# Altium PCB FILTER.PcbDoc
Units mm, origin at the board's own origin, x right, y up, seen from the top; angles counter-clockwise.
Board outline 88 x 30 mm, 2 copper layers (Top Layer, Bottom Layer), stack 1.071 mm thick; 17 components, 10 nets, 32 pads, 10 vias.
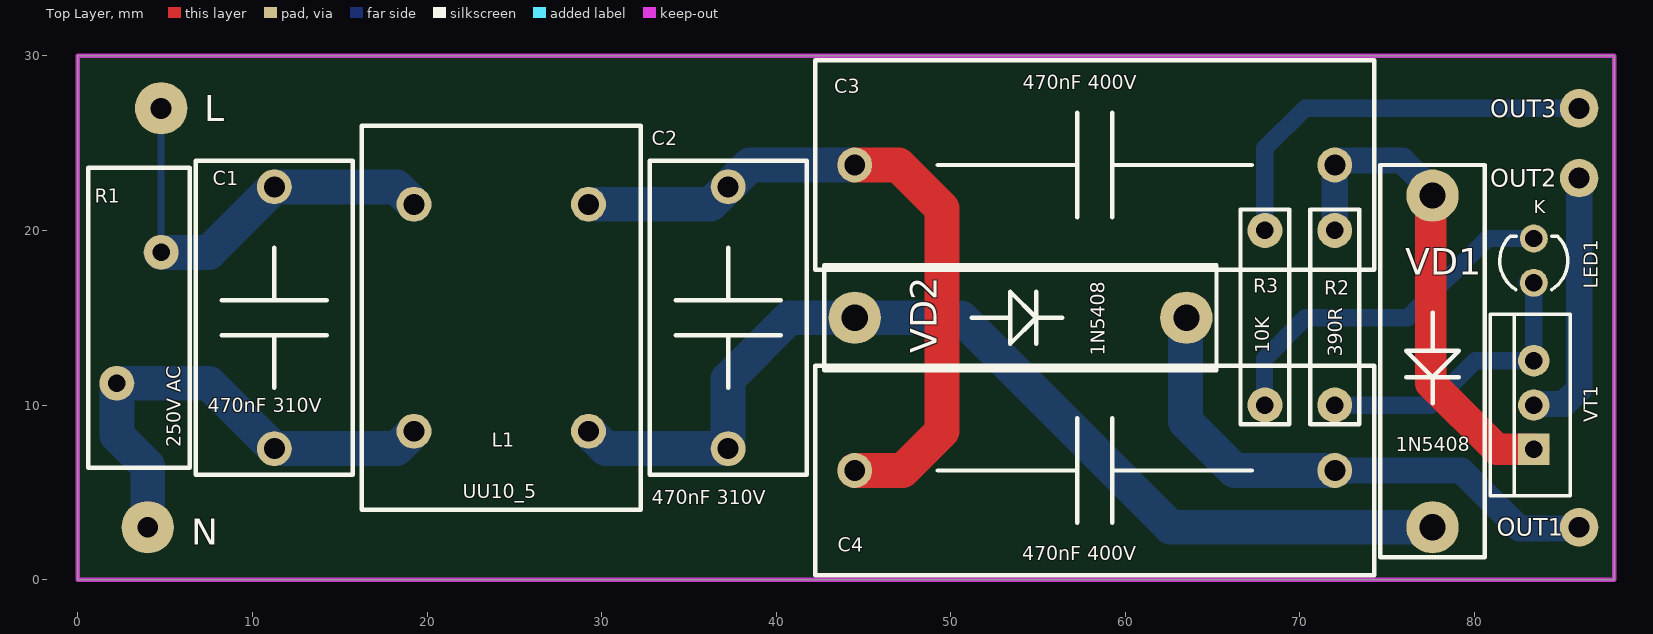
[diagram p0: Top Layer view]
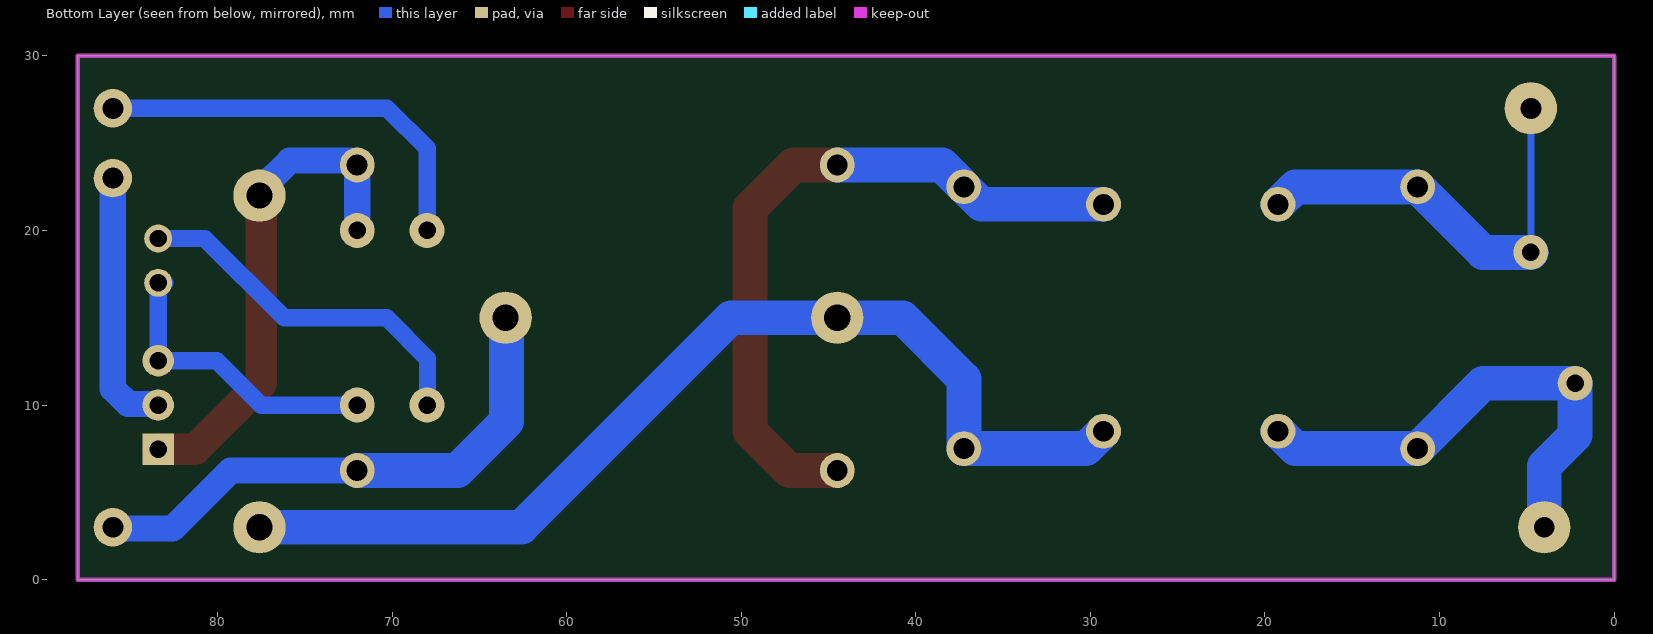
[diagram p1: Bottom Layer view, seen from below]
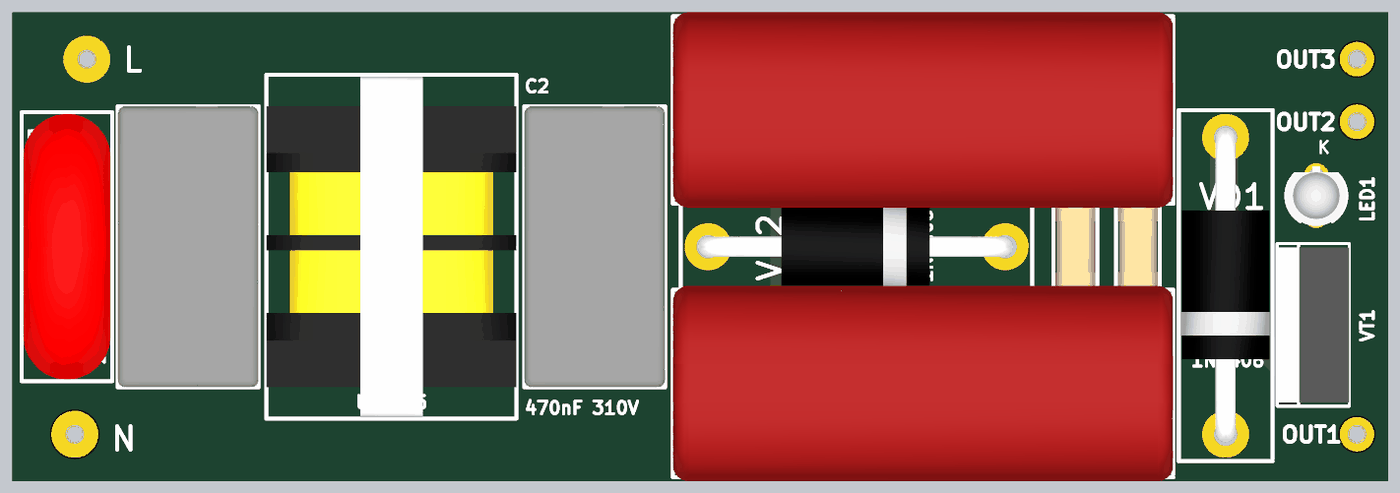
[diagram p2: 3D render of the assembled board from above, using the file's embedded part models]

## Layer stack, top to bottom
Top Solder: solder mask 0.0102, Solder Resist, Dk 3.5
Top Layer: signal copper 0.0356
Dielectric 1: dielectric 1, FR-4, Dk 4.8
Bottom Layer: signal copper 0.0356
Bottom Solder: solder mask 0.0102, Solder Resist, Dk 3.5

## Board outline
0,0 88,0 88,30 0,30

## Design rules (kind name [scope] priority, off if disabled: settings)
Clearance [All] p1: gap=0.3 ignorepadtopadclearanceinfootprint=FALSE except(0.2: Text-Text Text-Hole)
ComponentClearance [All] p1: gap=0.1 collisioncheckmode=3 verticalgap=0.1 showdistances=FALSE
DiffPairsRouting [All] p1: maxlimit=0.254 minlimit=0.254 mostfreqgap=0.254 substack1={A23D90DD-733B-49C5-8102-56B3D284E3A0} toplayer_{a23d90dd-733b-49c5-8102-56b3d284e3a0}_minwidth=0.381 toplayer_{a23d90dd-733b-49c5-8102-56b3d284e3a0}_maxwidth=0.381 toplayer_{a23d90dd-733b-49c5-8102-56b3d284e3a0}_prefwidth=0.381 bottomlayer_{a23d90dd-733b-49c5-8102-56b3d284e3a0}_minwidth=0.381 bottomlayer_{a23d90dd-733b-49c5-8102-56b3d284e3a0}_maxwidth=0.381 bottomlayer_{a23d90dd-733b-49c5-8102-56b3d284e3a0}_prefwidth=0.381 toplayer_minwidth=0.381 toplayer_maxwidth=0.381 toplayer_prefwidth=0.381 bottomlayer_minwidth=0.381 bottomlayer_maxwidth=0.381 bottomlayer_prefwidth=0.381 substack2={0B3DB408-A969-412D-8C07-BA8AE97219D9} toplayer_{0b3db408-a969-412d-8c07-ba8ae97219d9}_minwidth=0.381 toplayer_{0b3db408-a969-412d-8c07-ba8ae97219d9}_maxwidth=0.381 toplayer_{0b3db408-a969-412d-8c07-ba8ae97219d9}_prefwidth=0.381 bottomlayer_{0b3db408-a969-412d-8c07-ba8ae97219d9}_minwidth=0.381 bottomlayer_{0b3db408-a969-412d-8c07-ba8ae97219d9}_maxwidth=0.381 bottomlayer_{0b3db408-a969-412d-8c07-ba8ae97219d9}_prefwidth=0.381 substack3={378827E6-B38F-4565-9D2F-710D8D441C30} toplayer_{378827e6-b38f-4565-9d2f-710d8d441c30}_minwidth=0.381 toplayer_{378827e6-b38f-4565-9d2f-710d8d441c30}_maxwidth=0.381 toplayer_{378827e6-b38f-4565-9d2f-710d8d441c30}_prefwidth=0.381 bottomlayer_{378827e6-b38f-4565-9d2f-710d8d441c30}_minwidth=0.381 bottomlayer_{378827e6-b38f-4565-9d2f-710d8d441c30}_maxwidth=0.381 bottomlayer_{378827e6-b38f-4565-9d2f-710d8d441c30}_prefwidth=0.381 substack4={1E65D4A7-266F-4925-B814-5E9C4A66F8EE} toplayer_{1e65d4a7-266f-4925-b814-5e9c4a66f8ee}_minwidth=0.381 toplayer_{1e65d4a7-266f-4925-b814-5e9c4a66f8ee}_maxwidth=0.381 toplayer_{1e65d4a7-266f-4925-b814-5e9c4a66f8ee}_prefwidth=0.381 bottomlayer_{1e65d4a7-266f-4925-b814-5e9c4a66f8ee}_minwidth=0.381 bottomlayer_{1e65d4a7-266f-4925-b814-5e9c4a66f8ee}_maxwidth=0.381 bottomlayer_{1e65d4a7-266f-4925-b814-5e9c4a66f8ee}_prefwidth=0.381 substack5={93C5D03E-862D-45F8-9871-970EEA9B3F11} toplayer_{93c5d03e-862d-45f8-9871-970eea9b3f11}_minwidth=0.381 toplayer_{93c5d03e-862d-45f8-9871-970eea9b3f11}_maxwidth=0.381 toplayer_{93c5d03e-862d-45f8-9871-970eea9b3f11}_prefwidth=0.381 bottomlayer_{93c5d03e-862d-45f8-9871-970eea9b3f11}_minwidth=0.381 bottomlayer_{93c5d03e-862d-45f8-9871-970eea9b3f11}_maxwidth=0.381 bottomlayer_{93c5d03e-862d-45f8-9871-970eea9b3f11}_prefwidth=0.381 maxuncoupledlength=12.7
Height [All] p1: minheight=0 maxheight=30 prefheight=30
HoleSize [All] p1: absolutevalues=TRUE maxlimit=6 minlimit=0.01 maxpercent=80.000 minpercent=20.000
HoleToHoleClearance [All] p1: gap=0.1 allowstackedmicrovias=TRUE
MinimumSolderMaskSliver [All] p1: minsoldermaskwidth=0.1
PlaneConnect [All] p1: pad.planeconnectstyle=Relief pad.reliefexpansion=0.5 pad.reliefentries=4 pad.reliefconductorwidth=0.5 pad.reliefairgap=0.15 via.planeconnectstyle=Direct via.reliefexpansion=0.5 via.reliefentries=4 via.reliefconductorwidth=0.5 via.reliefairgap=0.15
PolygonConnect VQFN20 [HasFootprint('VQFN20')] p1: connectstyle=Direct reliefconductorwidth=0.254 reliefentries=4 polygonreliefangle="90 Angle" airgapwidth=0.254
PolygonConnect [All] p2: thpad.connectstyle=Relief thpad.reliefconductorwidth=0.3 thpad.reliefentries=4 thpad.polygonreliefangle="90 Angle" thpad.airgapwidth=0.15 smdpad.connectstyle=Relief smdpad.reliefconductorwidth=0.3 smdpad.reliefentries=4 smdpad.polygonreliefangle="90 Angle" smdpad.airgapwidth=0.15 via.connectstyle=Direct via.reliefconductorwidth=0.3 via.reliefentries=4 via.polygonreliefangle="90 Angle" via.airgapwidth=0.15
RoutingVias [All] p1: holewidth=0.1 width=0.1 viastyle="Through Hole" minholewidth=0.11 minwidth=0.1 maxholewidth=2 maxwidth=1
ShortCircuit [All] p1: allowed=TRUE
SilkToSolderMaskClearance [IsPad] p1: minsilkscreentomaskgap=0.1 clearancetoexposedcopper=TRUE
SolderMaskExpansion SolderMaskExpansion_Via [IsVia] p1: expansion=0.102 istentingtop=TRUE
SolderMaskExpansion [All] p2: expansion=0.01 istentingtop=FALSE
UnRoutedNet [All] p1: checkbadconnections=TRUE
Width [All] p1: maxlimit=5 minlimit=0.2 preferedwidth=0.3 substack1={A23D90DD-733B-49C5-8102-56B3D284E3A0} substack2={0B3DB408-A969-412D-8C07-BA8AE97219D9} substack3={378827E6-B38F-4565-9D2F-710D8D441C30} substack4={1E65D4A7-266F-4925-B814-5E9C4A66F8EE} substack5={93C5D03E-862D-45F8-9871-970EEA9B3F11}
20 further rules are at their usual default settings.

## Components (designator, comment, footprint, x,y, rotation, side; value= is the part's Value field where it differs from the comment)
C1 "470nF 310V" CAP_FILM 11.25,15 r270 top locked
C2 "470nF 310V" CAP_FILM 37.25,15 r270 top locked
C3 "470nF 400V" "CAP 225J 400V" 58.25,23.75 r180 top locked
C4 "470nF 400V" "CAP 225J 400V" 58.25,6.25 r180 top locked
L "Test_Point_PCB" Test_Point#1 4.77,27 r90 top locked
L1 "UU10_5" UU10_5 24.25,15 r90 top locked
LED1 "151033BS03000" "Type 3mm" 83.4,18.27 r90 top locked
N "Test_Point_PCB" Test_Point#2 4,3 r90 top locked
OUT1 "Test_Point_PCB" Test_Point#3 86,3 r90 top locked
OUT2 "Test_Point_PCB" Test_Point#3 86,23 r90 top locked
OUT3 "Test_Point_PCB" Test_Point#3 86,27 r90 top locked
R1 "250V AC" VARISTOR 3.5,15 r270 top locked
R2 "390R" RES025W 72,15 r90 top locked
R3 "10K" RES025W 68,15 r90 top locked
VD1 "1N5408" 1N5408 77.6,12.5 r90 top locked
VD2 "1N5408" 1N5408 54,15 r180 top
VT1 "TYN412" TO-220-3 81,10 r90 top locked

## Footprints (in the part's own frame and the unit in brackets; to place one, negate y for a bottom-side part, rotate by r counter-clockwise, add the part's x,y. Pads: shape width x height; smd on the part's side, far side on the other; paste and mask are expansions set on the pad)
1N5408 [mm]
  round 3 hole 1.5: 1(-9.5,0) 2(9.5,0)
  silkscreen extent -11.22,-3 11.25,3, body extent -10,-2.82 10.14,2.82, height 6.81
"CAP 225J 400V" [mm]
  round 2 hole 1.2: 1(-13.75,0) 2(13.75,0)
  silkscreen extent -16,-6 16,6, body extent -16,-6.25 16,6.25, height 26.5
CAP_FILM [mm]
  round 2 hole 1.2: 1(-7.5,0) 2(7.5,0)
  silkscreen extent -9,-4.5 9,4.5, body extent -9,-4.5 9,4.5, height 17.5
RES025W [mm]
  round 2 hole 1: 1(-5,0) 2(5,0)
  silkscreen extent -6.1,-1.4 6.2,1.4, body extent -5.33,-1.24 5.33,1.24, height 1.55
Test_Point#1 [mm]
  round 3 hole 1: 1(0,0)
Test_Point#2 [mm]
  round 3 hole 1 unplated paste+0.102 mask+0.102: 1(0,0)
Test_Point#3 [mm]
  round 2.2 hole 1 unplated paste+0.102 mask+0.102: 1(0,0)
TO-220-3 [mm]
  rect 1.8x1.8 hole 1: 1(-2.54,-2.4)
  round 1.8 hole 1: 2(0,-2.4) 3(2.54,-2.4)
  silkscreen extent -5.2,-4.5 5.2,0.1, body extent -4.95,-4.5 4.95,0, height 18.8
"Type 3mm" [mm] "THT, LED-3mm, 2pin- Body 4.15mm(max)"
  round 1.6 hole 1: 1(1.27,0) 2(-1.27,0)
  silkscreen extent -1.66,-1.95 1.4,1.95, body extent -1.93,-1.94 1.87,1.94, height 10.5
UU10_5 [mm]
  round 2 hole 1.2: 1(-6.5,5) 2(6.5,5) 3(6.5,-5) 4(-6.5,-5)
  silkscreen extent -11,-8 11,8, body extent -10.9,-8 10.89,8, height 24.48
VARISTOR [mm]
  round 2 hole 1: 1(-3.75,1.27) 2(3.75,-1.27)
  silkscreen extent -8.6,-2.9 8.6,2.9, body extent -8.5,-2.8 8.5,2.8, height 22.49

## Part data
C1 C2: library part CAP_FILM
C3 C4: library part "CAP 225J 400V"
L N OUT1 OUT2 OUT3: library part TP_PCB?, "Test_Point"
LED1: "THT LED round mono-color waterclear, WL-TMRW , Blue", Emitting color=Blue, Manufacturer="Wuerth Elektronik", ComponentLink1Description="Manufacturer URL", ComponentLink1URL=http://www.we-online.com, ComponentLink2Description=Datasheet, ComponentLink2URL=http://katalog.we-online.de/pbs/datasheet/7448042001.pdfhttp://katalog.we-online.de/pbs/datasheet/7448042001.pdfhttp://katalog.we-online.de/pbs/datasheet/7448042001.pdfhttp://katalog.we-online.de/pbs/datasheet/151033BS03000.pdf, PackageReference="Type 3mm", PartNumber=151033BS03000
R1: library part VARISTOR
R2 R3: library part RES
VD1 VD2: library part DIODE

## Via types
v1: diameter 2, hole 1.2, Top Layer to Bottom Layer, tented both sides, 5 vias
v2: diameter 1.8, hole 1, Top Layer to Bottom Layer, tented both sides, 5 vias

## Nets (pads, with @x,y where several pads share a name; then routed paths per layer and width w, separated by ;. In a path a pad name is that pad's centre, name@x,y a point inside that pad or via, vN(x,y) a via of type N, cw(c..) or ccw(c..) an arc to the next point about the centre after c; other vN are vias at no path point)
NetC1_1: C1.1 L1.2 L.1 R1.1 | length 24.8
  Bottom Layer w0.4: R1.1 v2(4.77,27) L.1@4.77,27.075
  Bottom Layer w2: R1.1 7.5,18.75 C1.1 18.25,22.5 L1.2
NetC1_2: C1.2 L1.1 N.1 R1.2 | length 28.2
  Bottom Layer w2: N.1@3.809,3.191 v2(4,3) 4,6.5 2.23,8.27 R1.2 7.5,11.25 C1.2 18.25,7.5 L1.1
NetC2_1: C2.1 C3.2 C4.2 L1.3 | length 40.9
  Top Layer w2: C4.2 47.25,6.25 49.5,8.5 49.5,21.25 47,23.75 C3.2
  Bottom Layer w2: L1.3 36.25,21.5 38.5,23.75 C3.2
NetC2_2: C2.2 L1.4 VD1.1 VD2.2 | length 59.1
  Bottom Layer w2: L1.4 30.25,7.5 C2.2 37.25,11.5 40.75,15 44.25,15 50.6,15 62.6,3 VD1.1@77.5,3
NetC3_1: C3.1 R2.2 VD1.2 VT1.1 | length 28.2
  Top Layer w1.8: VD1.2@77.5,22 77.5,11.25 81.29,7.46 VT1.1
  Bottom Layer w1.5: R2.2 C3.1 72.135,23.75 72.385,24 75.871,24 77.371,22.5 VD1.2@77.5,22.5
NetC4_1: C4.1 OUT1.1 VD2.1 | length 31.1
  Bottom Layer w1.5: C4.1 79.25,6.25 82.575,2.925 OUT1.1@86.125,2.925
  Bottom Layer w2: VD2.1@63.45,14.95 63.45,9.05 66.25,6.25 C4.1
  other v1: 86,3
  other v2: 86,3
NetLED1_1: LED1.1 R3.1 | length 20.9
  Bottom Layer w1: R3.1@67.975,10.025 67.975,12.665 70.31,15 76.18,15 80.72,19.54 LED1.1
NetLED1_2: LED1.2 R2.1 VT1.3 | length 17.1
  Bottom Layer w1: R2.1 77.5,10 80.04,12.54 VT1.3 83.4,16.723 83.123,17 LED1.2@83.023,17
NetOUT2_1: OUT2.1 VT1.2 | length 14.8
  Bottom Layer w1.5: VT1.2 83.457,10.057 85.121,10.057 86,10.936 OUT2.1@86,22.75
  other v1: 86,23
  other v2: 86,23
NetOUT3_1: OUT3.1 R3.2 | length 23.7
  Bottom Layer w1: R3.2 68,24.703 70.297,27 v2(86,27)
  other v1: 86,27
copper on no net:
  other v1: 4,3 4.77,27

## Keep-outs
Keep-Out Layer:
  the board outline again, w0.254

## Text inside footprints (layer, text, board x,y; h text height)
LED1: Top Overlay "K" at 83.4,21 h0.76; Mechanical 15 "K" at 83.966,20.77 h0.76 r90